# Altium PCB F407.PcbDoc (part 1 of 12)
Units mil, origin at the board's own origin, x right, y up, seen from the top; angles counter-clockwise.
Board outline 6062.25 x 4305.79 mil, 2 copper layers (Top Layer, Bottom Layer); 68 components, 138 nets, 423 pads, 108 vias.
Unrouted connection lines stored in the file: 2.
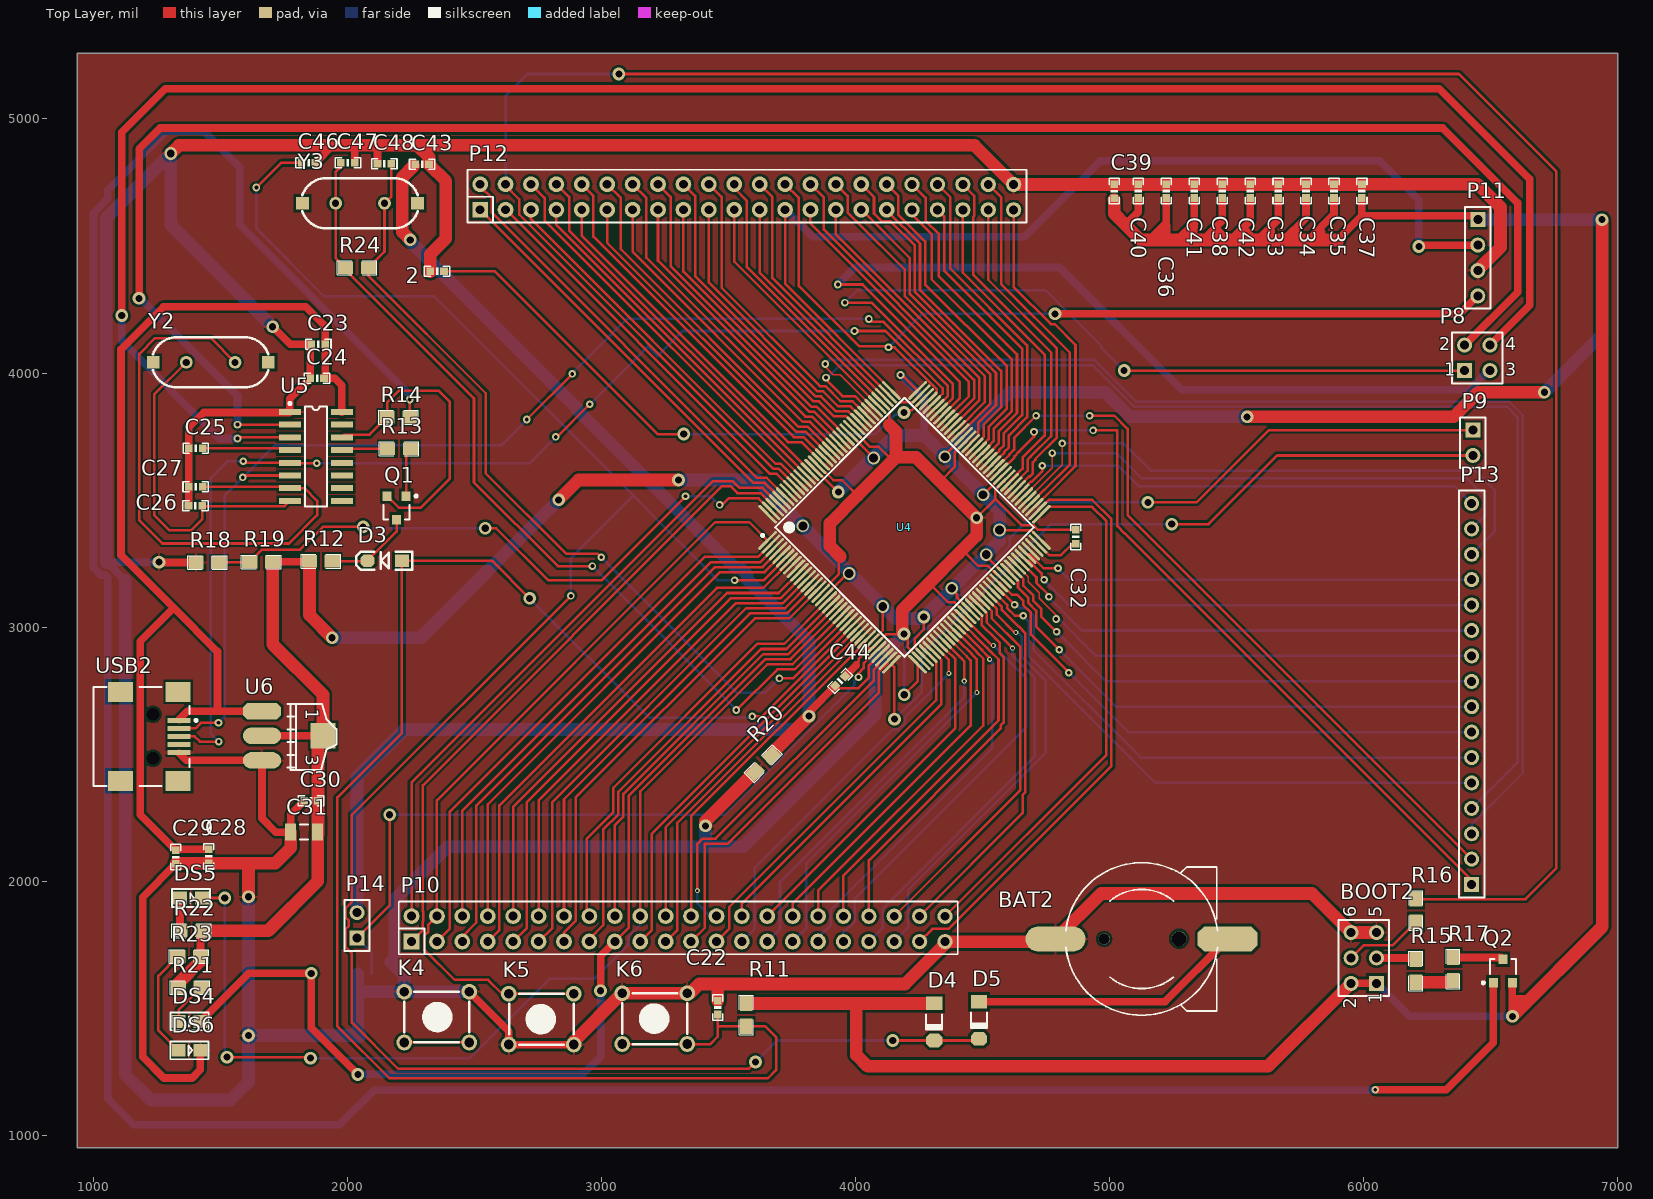
[diagram p0: Top Layer view]
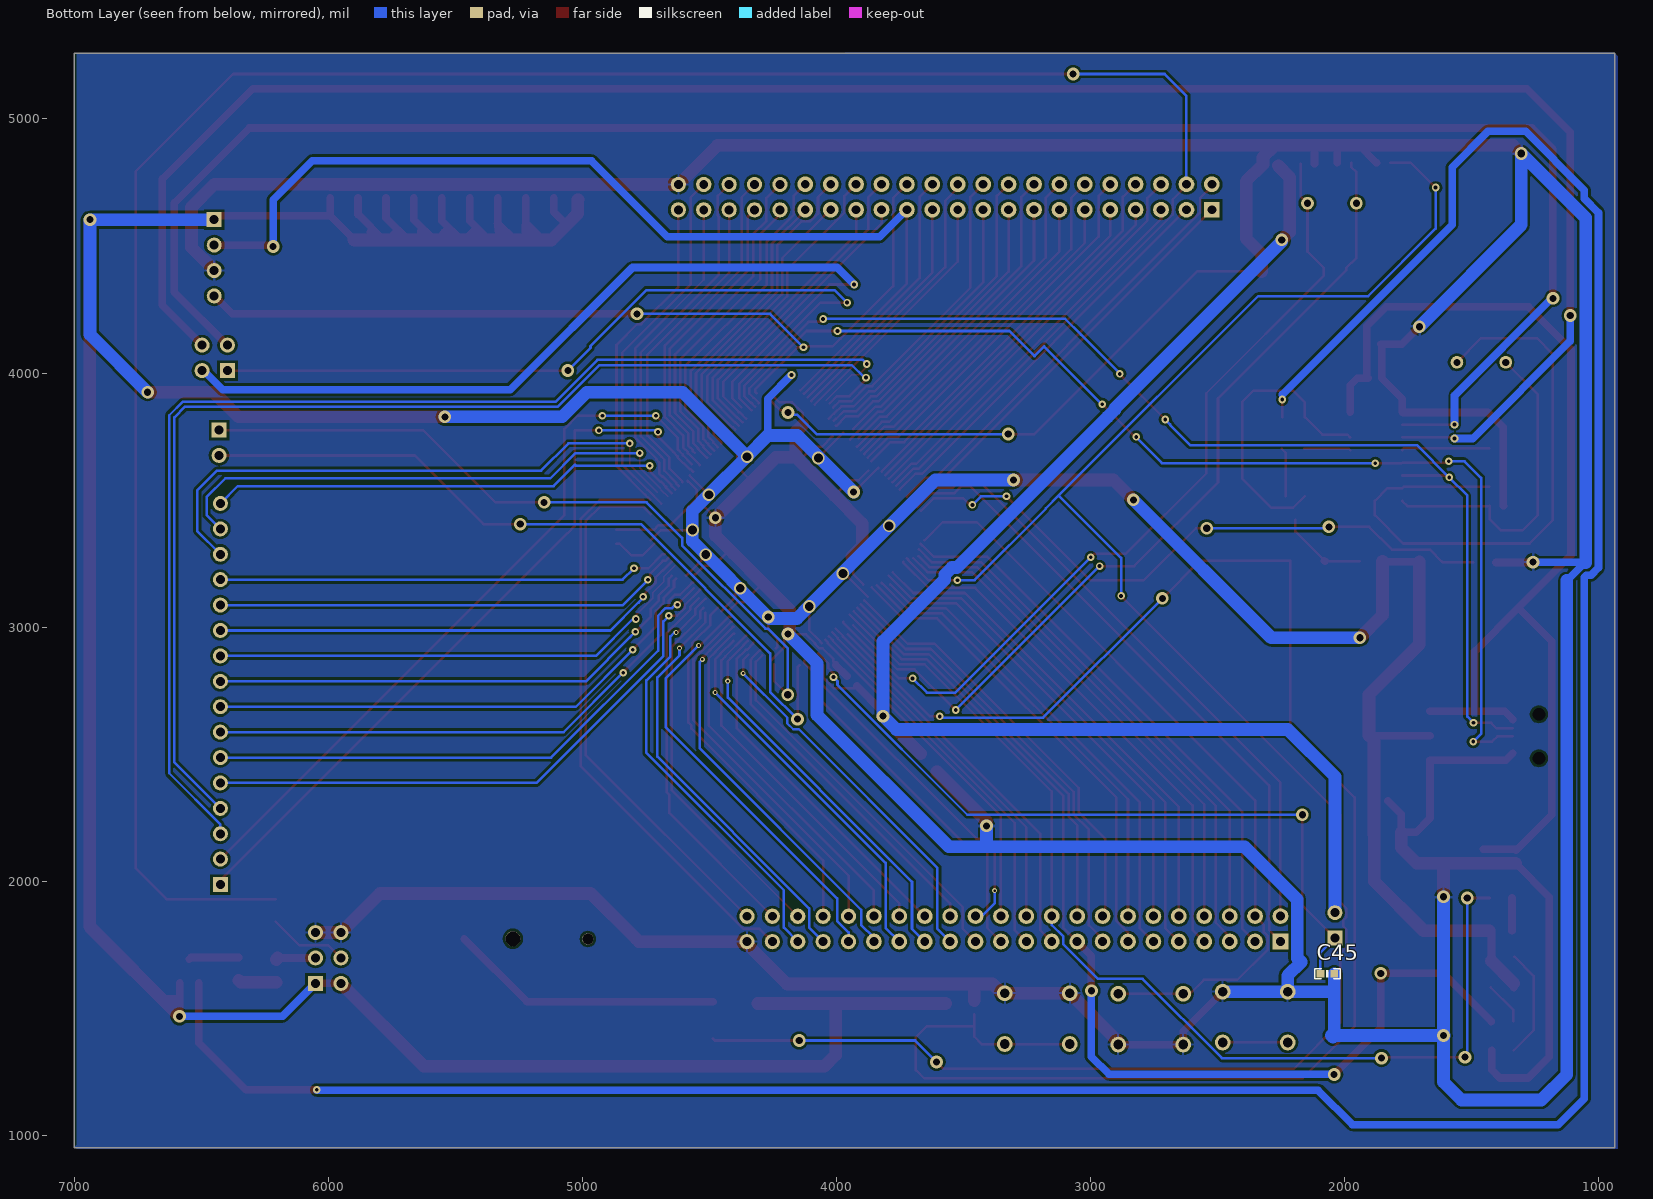
[diagram p1: Bottom Layer view, seen from below]

## Layer stack, top to bottom
Top Solder: solder mask 0.4, Solder Resist, Dk 3.5
Top Layer: signal copper 1.4
Dielectric 1: dielectric 12.6, FR-4, Dk 4.8
Bottom Layer: signal copper 1.4
Bottom Solder: solder mask 0.4, Solder Resist, Dk 3.5

## Board outline
937.75,952.41 937.75,5258.2 7000,5258.2 7000,952.41

## Design rules (kind name [scope] priority, off if disabled: settings)
Clearance U4 [InComponent('U4')] p1: gap=1 // UU
Clearance [All] p2: gap=10
PolygonConnect [All] p1: connectstyle=Relief reliefconductorwidth=10 reliefentries=4 polygonreliefangle="90 Angle" airgapwidth=10
RoutingVias [All] p1: holewidth=28 width=50 viastyle="Through Hole" minholewidth=28 minwidth=50 maxholewidth=28 maxwidth=50
SolderMaskExpansion [All] p1: expansion=4
Width VDD [InNet('VCC3.3')] p1: maxlimit=50 minlimit=10 preferedwidth=50
Width GND [InNet('GND')] p2: maxlimit=50 minlimit=10 preferedwidth=10
Width [All] p3: maxlimit=50 minlimit=5 preferedwidth=10
30 further rules are at their usual default settings.

## Components (designator, comment, footprint, x,y, rotation, side; value= is the part's Value field where it differs from the comment)
2 "225" 0603P 2353.72,4400.13 r180 top
BAT2 "BAT" BATM 5126.31,1772.91 r90 top
BOOT2 "Header 3X2" HDR2X3 6050.52,1598.29 r90 top
C22 "104" 0603P 3458.11,1503.44 r270 top
C23 "104" 0603P 1886.12,4113.86 r0 top
C24 "10uF" 0603P 1881.15,3979.42 r0 top
C25 "104" 0603P 1403.96,3703.78 r0 top
C26 "22" 0603P 1402.36,3478.35 r0 top
C27 "22" 0603P 1403.66,3552.69 r0 top
C28 "10uF" 0603P 1454.88,2098.42 r90 top
C29 "104" 0603P 1325.36,2095.4 r90 top
C30 "104" 0603P 1857.38,2317.12 r0 top
C31 "220uF" C1206 1830.49,2193.2 r180 top
C32 "C5" 0603P 4867.06,3355.37 r90 top
C33 "104" 0603P 5663.25,4716.58 r270 top
C34 "104" 0603P 5773.25,4716.58 r270 top
C35 "104" 0603P 5883.25,4716.58 r270 top
C36 "104" 0603P 5223.25,4716.58 r270 top
C37 "104" 0603P 5993.25,4716.58 r270 top
C38 "104" 0603P 5443.25,4716.58 r270 top
C39 "104" 0603P 5018.32,4716.08 r270 top
C40 "104" 0603P 5113.25,4716.58 r270 top
C41 "104" 0603P 5333.25,4716.58 r270 top
C42 "104" 0603P 5553.25,4716.58 r270 top
C43 "10uF" 0603P 2294.98,4821.34 r180 top
C44 "104" 0603P 3939.83,2788.33 r225 top
C45 "225" 0603P 2068.2,1636.12 r0 bottom
C46 "104" 0603P 1847.72,4827.95 r0 top
C47 "22" 0603P 2002.45,4828.32 r180 top
C48 "22" 0603P 2145.88,4824.29 r0 top
D3 "1N4148" SOD-123 2147.87,3261.73 r180 top
D4 "1N4148" "MINI_MELF (LL34)" 4309.74,1446.5 r270 top
D5 "1N4148" "MINI_MELF (LL34)" 4486.29,1452.92 r270 top
DS4 "LED0" SMDLED 1336.25,1448.57 r0 top
DS5 "LED1" SMDLED 1341.77,1934.4 r0 top
DS6 "LED3" SMDLED 1335.03,1335.03 r0 top
K4 "KEY_M" KEY_M 2224.66,1565.79 r0 top
K5 "KEY_M" KEY_M 2891.73,1357.47 r180 top
K6 "" KEY_M 3337.84,1359.63 r180 top
P8 "Header 2X2" HDR2X2 6396.88,4009.83 r0 top
P9 "Header 2" HDR1X2 6429.9,3775.74 r270 top
P10 "HEAD2*22" HEAD2*22 2252.61,1762.57 r0 top locked
P11 "Header 4" HDR1X4 6449.03,4603.71 r270 top
P12 "HEAD2*22" HEAD2*22 2522.61,4642.57 r0 top
P13 "Header 16" HDR1X16 6425.05,1987.04 r90 top
P14 "" HDR1X2 2038.59,1776.39 r90 top
Q1 "S8050" SOT-23R 2194.7,3474.96 r180 top
Q2 "S8550" SOT-23R 6547.45,1642.01 r0 top
R11 "10K" 0805 3570.07,1429.35 r90 top
R12 "10K" 0805 1941.15,3259.18 r180 top
R13 "1K" 0805 2248.64,3702.26 r180 top
R14 "1K" 0805 2246.85,3826.56 r180 top
R15 "10K" 0805 6204.59,1602.45 r90 top
R16 "10K" 0805 6206.14,1840.1 r90 top
R17 "1K" 0805 6351.99,1610.07 r90 top
R18 "0R" 0805 1494.6,3254.76 r180 top
R19 "0R" 0805 1616.82,3257.04 r0 top
R20 "10R" 0805 3668.77,2494.85 r225 top
R21 "510R" 0805 1425.52,1581.95 r180 top
R22 "510R" 0805 1341.64,1805.54 r0 top
R23 "510R" 0805 1332.69,1703.91 r0 top
R24 "R" 0805 1993.32,4414.79 r0 top
U4 "STM32F407ZET6" LQFP144 4193.03,3392.99 r45 top locked
U5 "CH340G" SOP16M 1876.7,3671.96 r270 top
U6 "AMS1117" AMS1117 1664.63,2672.66 r270 top
USB2 "USB5" USB/SM0.8-6H5 1029.22,2570.66 r180 top
Y2 "12MHz" XTAL_US 1366.52,4042.43 r0 top
Y3 "8MHz" XTAL_US 1954.45,4668.32 r0 top

## Footprints (in the part's own frame and the unit in brackets; to place one, negate y for a bottom-side part, rotate by r counter-clockwise, add the part's x,y. Pads: shape width x height; smd on the part's side, far side on the other; paste and mask are expansions set on the pad)
0603P [mil]
  rect 30x30 smd: 1(-27,0) 2(27.5,-0.06)
  silkscreen extent -50,-20 50,20
0805 [mil]
  rect 60x50 smd: 1(0,-0.06) 2(90,-0.06)
  silkscreen extent -33,-27 123,27
AMS1117 [mil]
  oct 65x150 smd: 1(3,0)
  oval 65x150 smd: 2(100.03,-0.06) 3(197,0)
  rect 100x100 smd: 4(100.03,239.94)
  silkscreen extent -26,100 234,293
BATM [mm]
  round 1.1 hole 1.1 unplated: 0(0,3.748)
  round 1.5 hole 1.5 unplated: 0(0.025,-3.752)
  oct 2.5x6 smd: 1(0,-8.602)
  oval 2.5x6 smd: 2(0,8.598)
  silkscreen extent -7.62,-7.58 7.62,7.57
C1206 [mm] "Chip Capacitor, Body 3.2x1.6mm, IPC High Density"
  rect 1.1x1.7 smd: 1(-1.35,0) 2(1.35,0)
  silkscreen extent -0.4,-0.75 0.4,0.75, body extent -1.7,-0.9 1.7,0.9, height 1.3
HDR1X2 [mm] "Connector; Header; 2 Position"
  rect 1.5x1.5 hole 0.9: 1(0,0)
  round 1.5 hole 0.9: 2(2.54,0)
  silkscreen extent -1.27,-1.27 3.81,1.27
HDR1X4 [mm] "Connector; Header; 4 Position"
  rect 1.5x1.5 hole 0.9: 1(0,0)
  round 1.5 hole 0.9: 2(2.54,0) 3(5.08,0) 4(7.62,0)
  silkscreen extent -1.27,-1.27 8.89,1.27
HDR1X16 [mm] "Connector; Header; 16 Position"
  rect 1.5x1.5 hole 0.9: 1(0,0)
  round 1.5 hole 0.9: 2(2.54,0) 3(5.08,0) 4(7.62,0) 5(10.16,0) 6(12.7,0) 7(15.24,0) 8(17.78,0) 9(20.32,0) 10(22.86,0) 11(25.4,0) 12(27.94,0) 13(30.48,0) 14(33.02,0) 15(35.56,0) 16(38.1,0)
  silkscreen extent -1.27,-1.27 39.37,1.27
HDR2X2 [mm] "Connector; Header; 2x2 Position"
  rect 1.5x1.5 hole 0.9: 1(0,0)
  round 1.5 hole 0.9: 2(0,2.54) 3(2.54,0) 4(2.54,2.54)
  silkscreen extent -1.27,-1.27 3.81,3.81
HDR2X3 [mm] "Connector; Header; 3x2 Position"
  rect 1.5x1.5 hole 0.9: 1(0,0)
  round 1.5 hole 0.9: 2(0,2.54) 3(2.54,0) 4(2.54,2.54) 5(5.08,0) 6(5.08,2.54)
  silkscreen extent -1.27,-1.27 6.35,3.81
HEAD2*22 [mil]
  rect 62x62 hole 35: 1(0.42,0.42)
  round 62 hole 35: 2(0.42,100.42) 3(100.42,0.42) 4(100.42,100.42) 5(200.42,0.42) 6(200.42,100.42) 7(300.42,0.42) 8(300.42,100.42) 9(400.42,0.42) 10(400.42,100.42) 11(500.42,0.42) 12(500.42,100.42) 13(600.42,0.42) 14(600.42,100.42) 15(700.42,0.42) 16(700.42,100.42) 17(800.42,0.42) 18(800.42,100.42) 19(900.42,0.42) 20(900.42,100.42) 21(1000.42,0.42) 22(1000.42,100.42) 23(1100.42,0.42) 24(1100.42,100.42) 25(1200.42,0.42) 26(1200.42,100.42) 27(1300.42,0.42) 28(1300.42,100.42) 29(1400.42,0.42) 30(1400.42,100.42) 31(1500.42,0.42) 32(1500.42,100.42) 33(1600.42,0.42) 34(1600.42,100.42)
  round 60 hole 35: 35(1700,0) 36(1700,100) 37(1800,0) 38(1800,100) 39(1900,0) 40(1900,100) 41(2000,0) 42(2000,100) 43(2100,0) 44(2100,100)
  silkscreen extent -50,-50 2150,157
KEY_M [mil]
  round 62 hole 38: 1(0,0) 1(255.91,0) 2(0,-200) 2(255.91,-200)
  silkscreen extent 0,-200 255,0
LQFP144 [mm]
  oval 2.54x0.3 smd: 1(-10.6,8.75) 2(-10.6,8.25) 3(-10.6,7.75) 4(-10.6,7.25) 5(-10.6,6.75) 6(-10.6,6.25) 7(-10.6,5.75) 8(-10.6,5.25) 9(-10.6,4.75) 10(-10.6,4.25) 11(-10.6,3.75) 12(-10.6,3.25) 13(-10.6,2.75) 14(-10.6,2.25) 15(-10.6,1.75) 16(-10.6,1.25) 17(-10.6,0.75) 18(-10.6,0.25) 19(-10.6,-0.25) 20(-10.6,-0.75) 21(-10.6,-1.25) 22(-10.6,-1.75) 23(-10.6,-2.25) 24(-10.6,-2.75) 25(-10.6,-3.25) 26(-10.6,-3.75) 27(-10.6,-4.25) 28(-10.6,-4.75) 29(-10.6,-5.25) 30(-10.6,-5.75) 31(-10.6,-6.25) 32(-10.6,-6.75) 33(-10.6,-7.25) 34(-10.6,-7.75) 35(-10.6,-8.25) 36(-10.6,-8.75) 73(10.6,-8.75) 74(10.6,-8.25) 75(10.6,-7.75) 76(10.6,-7.25) 77(10.6,-6.75) 78(10.6,-6.25) 79(10.6,-5.75) 80(10.6,-5.25) 81(10.6,-4.75) 82(10.6,-4.25) 83(10.6,-3.75) 84(10.6,-3.25) 85(10.6,-2.75) 86(10.6,-2.25) 87(10.6,-1.75) 88(10.6,-1.25) 89(10.6,-0.75) 90(10.6,-0.25) 91(10.6,0.25) 92(10.6,0.75) 93(10.6,1.25) 94(10.6,1.75) 95(10.6,2.25) 96(10.6,2.75) 97(10.6,3.25) 98(10.6,3.75) 99(10.6,4.25) 100(10.6,4.75) 101(10.6,5.25) 102(10.6,5.75) 103(10.6,6.25) 104(10.6,6.75) 105(10.6,7.25) 106(10.6,7.75) 107(10.6,8.25) 108(10.6,8.75)
  oval 0.3x2.54 smd: 37(-8.75,-10.6) 38(-8.25,-10.6) 39(-7.75,-10.6) 40(-7.25,-10.6) 41(-6.75,-10.6) 42(-6.25,-10.6) 43(-5.75,-10.6) 44(-5.25,-10.6) 45(-4.75,-10.6) 46(-4.25,-10.6) 47(-3.75,-10.6) 48(-3.25,-10.6) 49(-2.75,-10.6) 50(-2.25,-10.6) 51(-1.75,-10.6) 52(-1.25,-10.6) 53(-0.75,-10.6) 54(-0.25,-10.6) 55(0.25,-10.6) 56(0.75,-10.6) 57(1.25,-10.6) 58(1.75,-10.6) 59(2.25,-10.6) 60(2.75,-10.6) 61(3.25,-10.6) 62(3.75,-10.6) 63(4.25,-10.6) 64(4.75,-10.6) 65(5.25,-10.6) 66(5.75,-10.6) 67(6.25,-10.6) 68(6.75,-10.6) 69(7.25,-10.6) 70(7.75,-10.6) 71(8.25,-10.6) 72(8.75,-10.6) 109(8.75,10.6) 110(8.25,10.6) 111(7.75,10.6) 112(7.25,10.6) 113(6.75,10.6) 114(6.25,10.6) 115(5.75,10.6) 116(5.25,10.6) 117(4.75,10.6) 118(4.25,10.6) 119(3.75,10.6) 120(3.25,10.6) 121(2.75,10.6) 122(2.25,10.6) 123(1.75,10.6) 124(1.25,10.6) 125(0.75,10.6) 126(0.25,10.6) 127(-0.25,10.6) 128(-0.75,10.6) 129(-1.25,10.6) 130(-1.75,10.6) 131(-2.25,10.6) 132(-2.75,10.6) 133(-3.25,10.6) 134(-3.75,10.6) 135(-4.25,10.6) 136(-4.75,10.6) 137(-5.25,10.6) 138(-5.75,10.6) 139(-6.25,10.6) 140(-6.75,10.6) 141(-7.25,10.6) 142(-7.75,10.6) 143(-8.25,10.6) 144(-8.75,10.6)
  silkscreen extent -10.72,-9.15 9.15,9.57, body extent -11,-11 11,11, height 1.6
"MINI_MELF (LL34)" [mm] "1.5*3.4mm(直径，脚距）"
  rect 1.37x1.62 smd: 1(-1.855,0)
  oct 1.37x1.62 smd: 2(1.855,0)
  silkscreen extent -0.76,-0.8 0.78,0.8, body extent -1.7,-0.75 1.7,0.75, height 1.5
SMDLED [mm]
  rect 1.4x1.27 smd: 1(0.001,-0.002) 2(2.211,-0.002)
  silkscreen extent -0.8,-0.89 3.01,0.89
SOD-123 [mil] "2.7x1.6X1.1mm（长宽高，不包括引脚）"
  rect 55x50 smd: 1(-67.5,0)
  oct 55x50 smd: 2(67.5,0)
  silkscreen extent -108,-35 112,35, body extent -73,-31 73,31, height 48
SOP16M [mm]
  rect 0.6x2.2 smd: 1(-4.445,-2.6) 2(-3.175,-2.6) 3(-1.905,-2.6) 4(-0.635,-2.6) 5(0.635,-2.6) 6(1.905,-2.6) 7(3.175,-2.6) 8(4.445,-2.6) 9(4.445,2.6) 10(3.175,2.6) 11(1.905,2.6) 12(0.635,2.6) 13(-0.635,2.6) 14(-1.905,2.6) 15(-3.175,2.6) 16(-4.445,2.6)
  silkscreen extent -5.42,-2.72 5,1.1
SOT-23R [mm]
  rect 0.9x0.95 smd: 1(0.95,-1.048) 2(-0.95,-1.048) 3(0,1.302)
  silkscreen extent -2.07,-1.17 1.3,1.3
USB/SM0.8-6H5 [mm]
  rect 2.3x0.5 smd: 1(-7.85,-1.6) 2(-7.85,-0.8) 3(-7.85,0) 4(-7.85,0.8) 5(-7.85,1.6)
  rect 2.5x2 smd: 6(-7.75,4.45) 7(-1.996,4.45) 8(-7.75,-4.45) 9(-1.996,-4.45)
  round 0.6 hole 1.27 unplated: MH1(-5.25,2.2) MH2(-5.25,-2.2)
  silkscreen extent -9.68,-4.95 0.7,4.95
XTAL_US [mil]
  round 50 hole 28: 1(0,0) 2(192.13,0)
  rect 50x50 smd: ""(-130.32,0) ""(322.44,0)
  silkscreen extent -131,-98 323,98

## Part data
2 C22 C23 C24 C25 C26 C27 C28 C29 C30 C32 C33 C34 C35 C36 C37 C38 C39 C40 C41 C42 C43 C44 C45 C46 C47 C48: library part C
BOOT2: "Header, 3-Pin, Dual row"
C31: library part CAP
D3: library part D
D4 D5: "高速开关二极管"
DS4 DS5 DS6: library part LED2, "Typical RED, GREEN, YELLOW, AMBER GaAs LED"
K6: library part KEY_M
P8: "Header, 2-Pin, Dual row"
P9: "Header, 2-Pin"
P11: "Header, 4-Pin"
P13: "Header, 16-Pin"
P14: library part "Header 2", "Header, 2-Pin"
Q1: library part NPN, "8050/BCW846/BCW847"
Q2: library part PNP, "8550/BCW68"
R11 R12 R13 R14 R15 R16 R17 R18 R19 R20 R21 R22 R23: library part R
U5: "USB2UART"
Y2 Y3: library part XTAL, "Crystal Oscillator"

## Via types
v1: diameter 30, hole 15, Top Layer to Bottom Layer, 48 vias
v2: diameter 50, hole 28, Top Layer to Bottom Layer, 42 vias
v3: diameter 50, hole 35, Top Layer to Bottom Layer, 9 vias
v4: diameter 20, hole 10, Top Layer to Bottom Layer, 8 vias
v5: diameter 50, hole 30, Top Layer to Bottom Layer, 1 vias

## Nets (pads, with @x,y where several pads share a name; then routed paths per layer and width w, separated by ;. In a path a pad name is that pad's centre, name@x,y a point inside that pad or via, vN(x,y) a via of type N, cw(c..) or ccw(c..) an arc to the next point about the centre after c; other vN are vias at no path point)
BOOT0: R15.1 R17.1 | length 150.6
  Top Layer w50: R15.1@6204.65,1602.45 6344.43,1602.45 R17.1@6352.05,1610.07
BOOT1: P12.4 R16.2 U4.136 | length 9694.9
  Top Layer w10: P12.4@2623.03,4742.99 2623.03,4737.99 2677.03,4683.99 2677.03,4623.94 3677.98,3622.99 3698.56,3622.99 U4.136@3765.7,3555.85 ; v2(3068.86,5177.04) 6374.42,5177.04 6758.69,4792.77 6758.69,2051.54 6637.25,1930.1 R16.2@6206.2,1930.1
  Bottom Layer w10: P12.4@2623.03,4742.99 2623.03,5090.86 2709.21,5177.04 v2(3068.86,5177.04)
GND: 2.2 BAT2.2 BOOT2.5 BOOT2.6 C22.1 C23.1 C24.1 C25.1 C26.1 C27.1 C28.1 C29.1 C30.1 C31.2 C32.2 C33.1 C34.1 C35.1 C36.1 C37.1 C38.1 C39.1 C40.1 C41.1 C42.1 C43.1 C44.1 C45.1 C46.2 C47.1 C48.1 DS6.2 K4.1 K5.1 K6.2 P10.43 P11.3 P12.44 R18.2 R20.2 U4.16 U4.31 U4.38 U4.51 U4.61 U4.83 U4.94 U4.107 U4.120 U4.130 U5.1 U6.3 USB2.5 | length 29026.3
  Top Layer w10: v2(3410,2218.27) v2@3410,2236.17 ; U4.130@3875.63,3615.63 3913.04,3578.22 3948.13,3578.22 4008.69,3517.67 ; U4.16@3895.29,3166.18 3895.29,3169.68 3935.12,3209.51 3935.12,3272.91 3940.42,3278.2 ; 4002.52,2851.01 4006.57,2851.01 4006.57,2859.57 4012.52,2865.52 4012.52,2866.27 4012.85,2866.61 4012.85,2875.53 4054.25,2916.94 4067.19,2916.94 4084.76,2934.51 4084.76,2936.74 4119.62,2971.59 v2@4167.7,2971.59 ; U4.120@4015.72,3751.7 4057.43,3710 4091.65,3710 4132.69,3668.96 4159.98,3668.96 ; 4132.63,3796.64 4132.63,3843.06 4174.43,3884.86 4225.11,3884.86 4229.96,3889.7 U4.107@4258.23,3917.98 ; v2(4190.67,2973.24) 4205.12,2958.79 4205.12,2921.57 U4.38@4258.45,2868.23 ; 4289.35,3173.2 4365.25,3097.3 4390.85,3097.3 4426.8,3061.34 U4.51@4423.86,3061.34 ; 4333.79,3574.01 4391.68,3631.9 4391.68,3688.64 4433.32,3730.28 U4.94@4433.32,3726.45 ; 4406.02,3289.87 4434.89,3289.87 4483.31,3241.44 4521.24,3241.44 4553.42,3209.27 U4.61@4557.05,3209.27 ; v2(4477.05,3430.75) 4551.01,3504.71 ; U4.83@4586.44,3572.67 4586.44,3576.78 4551.01,3541.35 4551.01,3504.71 ; C32.2@4867.13,3382.87 4719.07,3382.87 4700.52,3401.41 4654.31,3401.41 4551.01,3504.71
  Top Layer w30: v2(1259.41,3256.18) 1260.76,3254.83 R18.2@1404.6,3254.83 ; C29.1@1328.37,2071.42 C29.1@1325.36,2068.4 1194.64,1937.69 1194.64,1310.03 1278.66,1226 1389.17,1226 1422.07,1258.9 DS6.2@1422.07,1334.97 ; USB2.5@1338.27,2504.33 1366.93,2475.66 U6.3@1664.63,2475.66 1664.63,2248.03 1719.46,2193.2 C31.2@1777.34,2193.2 1777.34,2264.08 C30.1@1830.38,2317.12 ; C26.1@1375.36,3478.35 1376.96,3479.96 C25.1@1376.96,3703.78 1376.96,3786.52 1435.28,3844.85 1772.22,3844.85 U5.1@1774.33,3846.96 1774.33,3899.6 C24.1@1854.15,3979.42 1854.15,4108.9 C23.1@1859.12,4113.86 1775.03,4113.86 v2(1706.41,4182.48) ; C46.2@1875.22,4827.89 1943.61,4896.28 ; 2028.39,4896.28 2029.45,4895.22 C47.1@2029.45,4828.32 ; 2118.52,4896.28 2118.88,4895.93 C48.1@2118.88,4824.29 ; K4.1@2480.57,1565.79 2635.82,1410.54 K5.1@2635.82,1357.47 K5.1@2891.73,1357.47 ; K6.2@3337.84,1559.63 K6.2@3349.6,1559.63 ; 3455.66,1595.5 3458.11,1593.05 ; C44.1@3958.92,2807.42 4002.52,2851.01 ; C39.1@5017.42,4742.19 5017.81,4742.57 C39.1@5018.32,4743.08
  Top Layer w50: v5(1305.3,4864.24) 1337.34,4896.28 1943.61,4896.28 2028.39,4896.28 2118.52,4896.28 2275.6,4896.28 ; C29.1@1328.37,2071.42 C28.1@1454.88,2071.42 1611.23,2071.42 ; v2(1611.23,1939.03) 1611.23,2071.42 ; C31.2@1777.34,2193.2 1777.34,2131.71 1717.05,2071.42 1611.23,2071.42 ; 2.2@2326.22,4400.19 2326.22,4467.26 2387.96,4529 2387.96,4755.37 C43.1@2321.98,4821.34 2321.98,4849.9 2275.6,4896.28 ; K5.1@2891.73,1357.47 2891.73,1369.42 K6.2@3081.93,1559.63 K6.2@3337.84,1559.63 ; K6.2@3349.6,1559.63 3385.47,1595.5 3455.66,1595.5 4195.02,1595.5 4352.61,1753.09 P10.43@4352.61,1762.57 4777.45,1762.57 BAT2.2@4787.79,1772.91 4967.19,1952.31 5796.5,1952.31 BOOT2.6@5950.52,1798.29 BOOT2.5@6050.52,1798.29 ; v2@3410,2236.17 R20.2@3605.09,2431.26 ; C22.1@3458.11,1530.44 3458.11,1593.05 ; 3940.42,3278.2 3899.35,3319.27 3899.35,3408.33 4008.69,3517.67 4159.98,3668.96 ; 4132.63,3796.64 4159.98,3769.29 4159.98,3668.96 ; v2(4190.67,2973.24) 4184.08,2979.83 4184.08,3067.93 4289.35,3173.2 4406.02,3289.87 4477.05,3360.9 v2(4477.05,3430.75) 4333.79,3574.01 4238.84,3668.96 4159.98,3668.96 ; P11.3@6448.19,4404.55 6538.48,4494.85 6538.48,4652.86 6447.77,4743.58 C37.1@5993.25,4743.58 5992.24,4742.57 5773.25,4742.57 5443.25,4742.57 5223.25,4742.57 5017.81,4742.57 P12.44@4622.61,4742.57 4468.89,4896.28 2275.6,4896.28
  Bottom Layer w10: 2041.2,1569.48 2044.89,1565.79 ; 3402.03,2135.81 3410,2143.78
  Bottom Layer w30: 1126.1,3183.65 1053.57,3256.18 v2(1259.41,3256.18)
  Bottom Layer w50: 1051.61,3254.21 1051.61,4610.55 v5(1305.3,4864.24) 1305.3,4583.6 v2(1706.41,4182.48) ; 1126.1,3183.65 1126.1,1239.94 1226.53,1139.5 1540.35,1139.5 1611.23,1210.38 v2(1611.23,1393.15) ; v2@1608.67,1393.15 v2(1611.23,1393.15) ; v2(1611.23,1939.03) v2(1611.23,1393.15) ; C45.1@2041.2,1636.12 2041.2,1569.48 2041.2,1393.15 ; 2044.89,1565.79 K4.1@2224.66,1565.79 ; K4.1@2480.57,1565.79 K4.1@2224.66,1565.79 ; 3410,2143.78 v2(3410,2218.27) ; v2@4191.25,2973.24 4076.56,2858.55 4076.56,2654.32 3558.06,2135.81 3402.03,2135.81 2393.85,2135.81 2187.03,1928.99 2187.03,1698.47 2170.95,1682.39 2224.66,1628.67 K4.1@2224.66,1565.79 ; v2(1611.23,1393.15) 2041.2,1393.15 ; 2041.2,1393.15 2041.2,1392.24 2046.16,1387.29 2052.02,1393.15 2041.2,1393.15
KEY0: K4.2 P10.1 U4.142 | length 2796.2
  Top Layer w10: K4.2@2224.66,1365.79 K4.2@2480.57,1365.79 ; P10.1@2253.03,1762.99 2298.03,1807.99 2298.03,1842.94 2299.03,1843.94 2299.03,1882.05 2298.03,1883.05 2298.03,2377.7 3475.54,3555.21 3508.68,3555.21 3535.9,3527.99 3626.08,3527.99 U4.142@3681.97,3472.11
KEY1: K5.2 P10.4 U4.1 | length 3052.7
  Top Layer w10: K5.2@2891.73,1557.47 K5.2@2635.82,1557.47 2608.86,1557.47 2554.54,1611.79 2422.99,1611.79 2302.59,1732.2 2302.59,1784.26 2318.32,1800 2318.32,1828.28 P10.4@2353.03,1862.99 2353.03,2317.99 3448.03,3412.99 3582.85,3412.99 U4.1@3654.35,3341.49
LED0: DS4.2 P10.17 U4.21 | length 4170.3
  Top Layer w10: P10.17@3053.03,1762.99 3107.03,1816.99 3107.03,2335.77 3645.41,2874.14 3744.67,2874.14 U4.21@3933.18,3062.66
  Top Layer w30: DS4.2@1423.29,1448.51 1612.58,1637.8 v2(1858.27,1637.8) 1858.27,1423.47 v2(2041.7,1240.05) ; v2(2997.07,1569.13) 2997.07,1707.03 P10.17@3053.03,1762.99
  Bottom Layer w30: v2(2041.7,1240.05) 2927.61,1240.05 2997.07,1309.51 v2(2997.07,1569.13)
LED1: DS5.2 P10.20 U4.22 | length 4189.3
  Top Layer w10: DS5.2@1428.81,1934.34 v2(1518,1934.34) ; v2(1526.96,1307.93) 1851.5,1307.93 v2(1855.36,1304.06) ; P10.20@3153.03,1862.99 3153.03,2353.48 3653.69,2854.14 3752.96,2854.14 U4.22@3947.33,3048.51
  Bottom Layer w10: v2(1518,1934.34) 1518,1316.88 v2(1526.96,1307.93) ; v2(1855.36,1304.06) 2483.89,1304.06 2795.57,1615.74 2970.83,1615.74 3107.03,1751.94 3107.03,1782.05 3153.03,1828.05 P10.20@3153.03,1862.99
Net2_1: 2.1 U4.106 | length 2216.4
  Top Layer w10: 2.1@2380.72,4400.13 2581.06,4400.13 3221.24,3759.94 v2(3324.42,3759.94) ; v2(4191,3844.86) 4199.86,3853.72 4222.25,3853.72 4238.24,3869.7 U4.106@4272.37,3903.84
  Bottom Layer w10: v2(3324.42,3759.94) 4078.69,3759.94 4154.46,3835.71 4181.86,3835.71 v2(4191,3844.86)
NetBAT2_1: BAT2.1 D5.1 | length 1081
  Top Layer w30: D5.1@4486.29,1525.95 5218,1525.95 BAT2.1@5464.95,1772.91
NetBOOT2_3: BOOT2.3 R15.2 | length 156.6
  Top Layer w30: BOOT2.3@6050.52,1698.29 R15.2@6198.8,1698.29
  Top Layer w50: R15.2@6198.8,1698.29 R15.2@6204.65,1692.45
NetBOOT2_4: BOOT2.4 R16.1 | length 314.4
  Top Layer w10: BOOT2.4@5950.52,1698.29 6000.95,1748.73 6114.83,1748.73 R16.1@6206.2,1840.1
NetC25_2: C25.2 U5.4 | length 345.7
  Top Layer w10: C25.2@1431.46,3703.71 1767.58,3703.71 U5.4@1774.33,3696.96
NetC26_2: C26.2 U5.8 Y2.1 | length 1292.5
  Top Layer w10: Y2.1@1366.52,4042.43 1241.38,3917.29 1241.38,3439.87 1300.4,3380.85 1385,3380.85 1429.86,3425.71 C26.2@1429.86,3478.29 1432,3476.15 1753.53,3476.15 U5.8@1774.33,3496.96
NetC27_2: C27.2 U5.7 Y2.2 | length 2410.4
  Top Layer w10: C27.2@1431.16,3552.63 1768.66,3552.63 U5.7@1774.33,3546.96 1831.81,3546.96 1881.65,3497.12 1881.65,3440.85 1770.2,3329.4 1272.69,3329.4 1181.81,3420.28 1181.81,4075.16 1244.33,4137.68 1463.39,4137.68 Y2.2@1558.64,4042.43
NetC32_1: C32.1 U4.71 | length 186.3
  Top Layer w10: U4.71@4717.79,3327.57 4762.06,3283.3 4808.65,3283.3 4853.72,3328.37 C32.1@4867.06,3328.37
NetD3_2: D3.2 Q1.3 R12.1 | length 349.6
  Top Layer w10: R12.1@1941.15,3259.25 D3.2@2077.89,3259.25 ; D3.2@2080.37,3261.73 2194.7,3376.06 Q1.3@2194.7,3423.7
  Top Layer w30: D3.2@2077.89,3259.25 D3.2@2080.37,3261.73
NetDS4_1: DS4.1 R21.1 | length 170.5
  Top Layer w10: DS4.1@1336.28,1448.51 1336.28,1492.78 R21.1@1425.52,1582.01
NetDS5_1: DS5.1 R22.1 | length 128.9
  Top Layer w30: R22.1@1341.64,1805.48 1341.64,1934.18 DS5.1@1341.8,1934.34
NetDS6_1: DS6.1 R23.1 | length 433.1
  Top Layer w10: R23.1@1332.69,1703.85 1256.41,1627.58 1256.41,1413.62 DS6.1@1335.06,1334.97
NetQ1_1: Q1.1 R14.2 U5.14 | length 1168.1
  Top Layer w10: U5.14@1979.06,3746.96 1989.66,3757.55 2087.79,3757.55 R14.2@2156.85,3826.62 2156.85,3883.88 2204.3,3931.33 2359.03,3931.33 2404.26,3886.1 2404.26,3584.97 2290,3470.71 2202.82,3470.71 Q1.1@2157.3,3516.22
NetQ1_2: Q1.2 R13.1 | length 192.9
  Top Layer w10: Q1.2@2232.11,3516.22 2232.11,3685.79 R13.1@2248.64,3702.32
NetQ2_2: Q2.2 R14.1 | length 11431.5
  Top Layer w10: v1(2246.37,3895.88) 2246.85,3895.4 R14.1@2246.85,3826.62
  Top Layer w30: v1(6045.85,1179.34) 6324.93,1179.34 6510.05,1364.46 Q2.2@6510.05,1600.75
  Bottom Layer w10: v1(2246.37,3895.88) 2246.37,3915.68
  Bottom Layer w30: 2246.37,3915.68 1577.48,4584.57 1577.48,4810.17 1436.38,4951.27 1288.51,4951.27 1057.39,4720.15 1057.39,4687.04 1001.61,4631.26 1001.61,3233.5 1030.9,3204.21 1048.97,3204.21 1057.39,3195.79 1057.39,1145.09 1160.17,1042.31 1969.32,1042.31 2105.45,1178.43 v1@6045.85,1178.43
NetQ2_3: Q2.3 R17.2 | length 198.2
  Top Layer w30: R17.2@6352.05,1700.07 6540.65,1700.07 Q2.3@6547.45,1693.27
NetR13_2: R13.2 U5.13 | length 181.8
  Top Layer w10: U5.13@1979.06,3696.96 1984.42,3702.32 R13.2@2158.64,3702.32
NetR18_1: R18.1 R19.1 U4.143 | length 2500.4
  Top Layer w10: R18.1@1494.6,3254.83 1614.68,3254.83 R19.1@1616.82,3256.97 1665.38,3305.53 1814.57,3305.53 1903.81,3394.77 v2(2062.46,3394.77) ; v2(2543.09,3389.36) 2586.12,3389.36 2791.38,3184.1 3000.06,3184.1 v1(3331.17,3515.21) ; v1(3465.5,3481.3) 3475.14,3481.3 3500.58,3506.74 3619.05,3506.74 U4.143@3667.82,3457.97
  Bottom Layer w10: v2(2062.46,3394.77) 2067.87,3389.36 v2(2543.09,3389.36) ; v1(3331.17,3515.21) 3431.59,3515.21 v1(3465.5,3481.3)
PA0: P10.26 U4.34 | length 1399.4
  Top Layer w10: v4(3378.03,1962.99) 3378.03,2147.28 3398.75,2167.99 3449.48,2167.99 4072.52,2791.02 4072.52,2833.14 4090.02,2850.64 4090.02,2858.92 U4.34@4113.47,2882.37
  Bottom Layer w10: v4(3378.03,1962.99) 3378.03,1912.99 3428.03,1862.99 P10.26@3453.03,1862.99
PA1: P10.23 U4.35 | length 1479.5
  Top Layer w10: P10.23@3353.03,1762.99 3407.03,1816.99 3407.03,2147.99 3498.21,2147.99 4092.52,2742.3 4092.52,2824.85 4127.61,2859.95 U4.35@4127.61,2868.23
PA2: P9.2 U4.36 | length 3009.2
  Top Layer w10: 4145.89,2849.95 4152.06,2843.78 4152.06,2640.19 v2(4153.93,2638.32) ; v2(5244.85,3405.72) 5389.46,3405.72 5659.47,3675.74 P9.2@6429.9,3675.74
  Bottom Layer w10: v2(4153.93,2638.32) 4261.37,2745.76 4261.37,2896.86 4770.23,3405.72 v2(5244.85,3405.72)
PA3: P9.1 U4.37 | length 2936.1
  Top Layer w10: v2(4192.06,2734.27) 4244.53,2786.75 4244.53,2853.87 U4.37@4244.31,2854.09 ; v2(5150.81,3491.17) 5343.03,3491.17 5627.59,3775.74 P9.1@6429.9,3775.74
  Bottom Layer w10: v2(4192.06,2734.27) 4191.49,2734.84 4191.49,2916.91 4269.2,2994.62 4280.33,2994.62 4607.48,3321.77 4607.48,3351.51 4747.14,3491.17 v2(5150.81,3491.17)
PA4: P10.25 U4.40 | length 1495.9
  Top Layer w10: P10.25@3453.03,1762.99 3503.03,1812.99 3503.03,1897.99 4318.03,2712.99 4318.03,2863.49 4292.37,2889.15 U4.40@4292.37,2889.99
PA5: P10.28 U4.41 | length 1388.1
  Top Layer w10: P10.28@3553.03,1862.99 3553.03,1912.99 4338.03,2697.99 4338.03,2871.78 4334.07,2875.74 4334.07,2876.58 4300.66,2909.99 U4.41@4300.21,2909.99
PA6: P10.27 U4.42 | length 1486.5
  Top Layer w10: U4.42@4348.21,2890.72 4368.03,2870.9 v4(4368.03,2817.99)
  Bottom Layer w10: P10.27@3553.03,1762.99 3603.03,1812.99 3603.03,2052.99 4148.36,2598.32 4170.5,2598.32 4193.93,2621.75 4193.93,2643.89 v4(4368.03,2817.99)
PA7: P10.30 U4.43 | length 1410.6
  Top Layer w10: P10.30@3653.03,1862.99 4393.03,2602.99 4393.03,2874.18 4356.49,2910.72 4352.48,2910.72 4328.05,2935.15 U4.43@4328.05,2937.83
PA8: P12.27 U4.100 | length 1120
  Top Layer w10: P12.27@3823.03,4642.99 3823.03,4589.01 4446.77,3965.28 4446.77,3908.97 4383.9,3846.11 4381.68,3846.11 U4.100@4355.89,3820.32
PA9: P8.3 U4.101 | length 3575.3
  Top Layer w10: v1(3931.09,4348.67) 4027.84,4348.67 4410.69,3965.82 4410.69,3901.18 U4.101@4375.62,3866.11
  Bottom Layer w30: v1(3931.09,4348.67) 3931.23,4348.67 3998.13,4415.57 4803.05,4415.57 5284.79,3933.83 6415.29,3933.83 P8.3@6494.09,4012.62
PA10: P8.1 U4.102 | length 3276.4
  Top Layer w10: v1(3958.29,4277.45) 4062.8,4277.45 4383.54,3956.71 4383.54,3902.31 U4.102@4334.58,3853.35 ; v2(5057.61,4009.83) P8.1@6396.88,4009.83
  Bottom Layer w10: v1(3958.29,4277.45) 4007.55,4326.71 4748.25,4326.71 4968.27,4106.7 4968.27,4099.17 v2(5057.61,4009.83)
PA11: U4.103 U5.6 USB2.2 | length 4602.1
  Top Layer w10: USB2.2@1338.27,2602.16 1402.53,2602.16 1424.08,2623.72 v1(1493.48,2623.72) ; v1(1588.92,3589.68) 1596.2,3596.96 U5.6@1774.33,3596.96 ; v1(2706.36,3817.45) v1(2885.7,3996.79) ; v1(4053.08,4213.04) 4064.63,4201.49 4110.49,4201.49 4363.54,3948.43 4363.54,3910.6 4336,3883.05 4334.51,3883.05 4334.51,3881.56 U4.103@4320.43,3867.49
  Bottom Layer w10: v1(1493.48,2623.72) 1517.55,2647.79 1517.55,3518.31 v1(1588.92,3589.68) 1716.1,3716.85 2608.21,3716.85 2687.4,3796.04 2687.4,3798.49 v1(2706.36,3817.45) ; v1@2884.77,3997.73 3038.72,4151.68 3100.09,4213.04 v1(4053.08,4213.04)
PA12: U4.104 U5.5 USB2.3 | length 4541.1
  Top Layer w10: USB2.3@1338.27,2570.66 1398.97,2570.66 1419.77,2549.86 v1(1494.1,2549.86) ; v1(1590.75,3652.94) 1596.73,3646.96 U5.5@1774.33,3646.96 1775.81,3645.48 v1(1879.84,3645.48) ; v1(2820.41,3748.98) 2825.9,3748.98 v1(2954.46,3877.54) ; v1(3996.1,4165.71) 4117.98,4165.71 4343.54,3940.15 4343.54,3918.88 4327.71,3903.05 4325.48,3903.05 4306.29,3883.86 U4.104@4306.29,3881.63
  Bottom Layer w10: v1(1494.1,2549.86) 1463.48,2580.47 1463.48,3587.57 1528.85,3652.94 v1(1590.75,3652.94) ; v1(1879.84,3645.48) 2719.37,3645.48 v1@2821.64,3747.75 ; v1@2955.15,3876.84 3183.03,4104.72 3221.08,4066.66 3320.13,4165.71 v1(3996.1,4165.71)
PA13: P11.4 P12.26 U4.105 | length 3561
  Top Layer w10: P12.26@3723.03,4742.99 3777.03,4688.99 3777.03,4342.35 3983.67,4135.71 3984.58,4135.71 4014.11,4106.18 4125.58,4106.18 v1(4130.23,4101.53) 4153.87,4101.53 4320.39,3935.01 4320.39,3926.24 U4.105@4314.24,3920.09
  Top Layer w30: v2(4785.29,4233.11) 6378.43,4233.11 P11.4@6449.03,4303.71
  Bottom Layer w10: v1@4130.23,4095.68 v1(4130.23,4101.53) 4261.81,4233.11 v2(4785.29,4233.11)
PA14: P11.2 P12.25 U4.109 | length 4027.9
  Top Layer w10: P12.25@3723.03,4642.99 3723.03,4351.95 U4.109@4142.42,3932.56
  Top Layer w30: v2(6217.19,4497.84) 6223.05,4503.71 P11.2@6449.03,4503.71
  Bottom Layer w30: P12.25@3723.03,4642.99 3830.02,4536.01 4665.53,4536.01 4964.55,4835.02 6063.56,4835.02 6217.19,4681.39 v2(6217.19,4497.84)
PA15: P12.24 U4.110 | length 1033.8
  Top Layer w10: P12.24@3623.03,4742.99 3673.03,4692.99 3673.03,4373.67 U4.110@4128.28,3918.42
PB0: P10.31 U4.46 | length 1513.1
  Top Layer w10: U4.46@4406.05,2946.01 4458.03,2894.03 4458.03,2892.78 4478.03,2872.78 v4(4478.03,2742.99)
  Bottom Layer w10: P10.31@3753.03,1762.99 3807.03,1816.99 3807.03,2071.99 v4(4478.03,2742.99)
PB1: P10.34 U4.47 | length 1423.6
  Top Layer w10: P10.34@3853.03,1862.99 3853.03,1962.99 4503.03,2612.99 4503.03,2876.07 4478.03,2901.07 4478.03,2902.32 4406.84,2973.5 U4.47@4402.84,2973.5
PB2: P10.33 U4.48 | length 1580.4
  Top Layer w10: U4.48@4403.73,3000.9 4407.74,3000.9 4498.03,2910.6 4498.03,2909.35 4524.39,2882.99 4525.64,2882.99 4528.03,2880.6 v4(4528.03,2872.99)
  Bottom Layer w10: P10.33@3853.03,1762.99 3853.03,1777.99 3903.03,1827.99 3903.03,1887.99 4538.03,2522.99 4538.03,2862.99 v4(4528.03,2872.99)
PB3: P12.7 U4.133 | length 1452.8
  Top Layer w10: P12.7@2823.03,4642.99 2823.03,4583.38 U4.133@3808.13,3598.28
PB4: P12.6 U4.134 | length 1602.5
  Top Layer w10: P12.6@2723.03,4742.99 2777.03,4688.99 2777.03,4601.09 U4.134@3793.99,3584.13
PB5: P12.5 U4.135 | length 1522.8
  Top Layer w10: P12.5@2723.03,4642.99 2723.03,4606.22 3686.26,3642.99 3706.85,3642.99 U4.135@3779.85,3569.99
PB7: P12.3 U4.137 | length 1584.7
  Top Layer w10: P12.3@2623.03,4642.99 2624.22,4642.99 3664.22,3602.99 3690.28,3602.99 U4.137@3751.56,3541.71
PB8: P12.2 U4.139 | length 1748.6
  Top Layer w10: P12.2@2523.03,4742.99 2523.03,4734.99 2569.03,4688.99 2569.03,4631.94 3612.98,3587.99 3650.94,3587.99 3723.95,3514.98 U4.139@3723.95,3514.09
PB9: P12.1 U4.140 | length 1621.7
  Top Layer w10: P12.1@2523.03,4642.99 3598.03,3567.99 3642.65,3567.99 U4.140@3682.84,3527.8
PB12: P10.44 U4.73 | length 2108.5
  Top Layer w10: P10.44@4352.61,1862.57 4987.42,2497.38 4987.42,3417.49 4931.74,3473.16 4760.38,3473.16 U4.73@4731.71,3444.49
PB13: P10.41 U4.74 | length 2301.9
  Top Layer w10: P10.41@4252.61,1762.57 4303.01,1812.98 4366.65,1812.98 5007.42,2453.74 5007.42,3425.77 4931.91,3501.28 4761.32,3501.28 U4.74@4753.24,3493.2
PB14: P12.43 U4.75 | length 1305.1
  Top Layer w10: P12.43@4622.61,4642.57 4622.61,4339.22 4768.72,4193.11 4784.24,4193.11 4865.94,4111.41 4865.94,3633.95 4753.26,3521.28 4753.03,3521.28 U4.75@4733.89,3502.13
PB15: P12.42 U4.76 | length 1453.4
  Top Layer w10: P12.42@4522.61,4742.57 4573.03,4692.14 4573.03,4351.18 4844.06,4080.15 4844.06,3640.36 4744.98,3541.28 4744.75,3541.28 4689.95,3486.48 U4.76@4689.95,3486.25
PC0: P10.19 U4.26 | length 1583.1
  Top Layer w10: P10.19@3153.03,1762.99 3199.03,1808.99 3199.03,1883.05 3198.03,1884.05 3198.03,2186.08 3975.27,2963.33 3975.27,2966.44 U4.26@4002.34,2993.5
PC1: P10.22 U4.27 | length 1432.6
  Top Layer w10: P10.22@3253.03,1862.99 3253.03,2212.8 3995.27,2955.04 3995.27,2958.16 U4.27@4016.48,2979.36
PC2: P10.21 U4.28 | length 1524.3
  Top Layer w10: P10.21@3253.03,1762.99 3299.03,1808.99 3299.03,2230.51 4015.27,2946.76 4015.27,2949.87 U4.28@4030.62,2965.22
PC3: P10.24 U4.29 | length 1374.6
  Top Layer w10: P10.24@3353.03,1862.99 3353.03,2256.23 4035.27,2938.47 4035.27,2941.59 U4.29@4044.76,2951.08
PC4: P10.29 U4.44 | length 1536.5
  Top Layer w10: U4.44@4349.83,2945.67 4364.05,2931.45 4364.05,2930.72 4364.78,2930.72 4418.03,2877.47 4418.03,2876.22 4428.03,2866.22 v4(4428.03,2787.99)
  Bottom Layer w10: P10.29@3653.03,1762.99 3703.03,1812.99 3703.03,1997.99 4428.03,2722.99 v4(4428.03,2787.99)
PC5: P10.32 U4.45 | length 1434.2
  Top Layer w10: P10.32@3753.03,1862.99 3753.03,1912.99 4453.03,2612.99 4453.03,2869.5 4438.03,2884.5 4438.03,2885.75 4358.11,2965.67 U4.45@4355.89,2965.67
PC6: P12.31 U4.96 | length 1139.9
  Top Layer w10: P12.31@4023.03,4642.99 4214.05,4451.97 4214.05,4311.13 4530.78,3994.4 4530.78,3879.85 4414.68,3763.75 U4.96@4412.46,3763.75
PC7: P12.30 U4.97 | length 1255.4
  Top Layer w10: P12.30@3923.03,4742.99 3969.03,4696.99 3969.03,4631.94 4003.98,4596.99 4005.01,4596.99 4194.05,4407.94 4194.05,4302.84 4508.79,3988.11 4508.79,3886.14 4408.76,3786.11 4406.53,3786.11 U4.97@4398.31,3777.89
PC8: P12.29 U4.98 | length 1128.3
  Top Layer w10: P12.29@3923.03,4642.99 3923.03,4545.58 4486.77,3981.84 4486.77,3892.4 4400.47,3806.11 4398.24,3806.11 U4.98@4384.17,3792.03
PC9: P12.28 U4.99 | length 1244.8
  Top Layer w10: P12.28@3823.03,4742.99 3875.53,4690.49 3875.53,4564.8 4466.77,3973.56 4466.77,3900.69 4392.19,3826.11 4389.96,3826.11 U4.99@4370.03,3806.18
PC10: P12.23 U4.111 | length 942.1
  Top Layer w10: P12.23@3623.03,4642.99 3623.03,4395.39 U4.111@4114.14,3904.28
PC11: P12.22 U4.112 | length 1091.8
  Top Layer w10: P12.22@3523.03,4742.99 3523.03,4727.99 3573.03,4677.99 3573.03,4417.1 U4.112@4099.99,3890.14
PC12: P12.21 U4.113 | length 1000.1
  Top Layer w10: P12.21@3523.03,4642.99 3523.03,4438.82 U4.113@4085.85,3876
PC13: P10.7 U4.7 | length 2092.7
  Top Layer w10: P10.7@2553.03,1762.99 2599.03,1808.99 2599.03,2298.99 3454.66,3154.62 3637.19,3154.62 3737.87,3255.3 U4.7@3737.87,3257.97
PD0: P13.3 U4.114 | length 4801.8
  Top Layer w5: v1(3880.88,4035.86) 3880.88,4024.26 3911.69,3993.45 3939.25,3993.45 4042.4,3890.3 U4.114@4043.27,3890.3
  Bottom Layer w10: v1(3880.88,4035.86) 3896.72,4051.7 4940.88,4051.7 5104.83,3887.74 6572.5,3887.74 6626.13,3834.11 6626.13,2425.15 6425.05,2224.07 P13.3@6425.05,2187.04
PD1: P13.4 U4.115 | length 4630.6
  Top Layer w10: v1(3884.19,3982.06) 3884.19,3974.06 3948.99,3909.26 3998.52,3909.26 U4.115@4026.7,3881.09
  Bottom Layer w10: v1(3884.19,3982.06) 3890.49,3982.06 3940.13,4031.7 4932.59,4031.7 5096.55,3867.74 6564.22,3867.74 6606.13,3825.83 6606.13,2468.12 P13.4@6425.05,2287.04
PD2: P12.20 U4.116 | length 1163.5
  Top Layer w10: P12.20@3423.03,4742.99 3473.03,4692.99 3473.03,4335.76 3860.39,3948.4 3881.57,3948.4 3940.7,3889.26 3988.81,3889.26 U4.116@4013.47,3864.6
PD3: P12.19 U4.117 | length 1116.1
  Top Layer w10: P12.19@3423.03,4642.99 3423.03,4356.77 3851.4,3928.4 3873.29,3928.4 3932.42,3869.26 3980.53,3869.26 4009.47,3840.32 4011.06,3840.32 4030.17,3821.21 U4.117@4030.17,3820.32
PD4: P12.18 U4.118 | length 1255
  Top Layer w10: P12.18@3323.03,4742.99 3369.03,4696.99 3369.03,4382.48 3843.12,3908.4 3865,3908.4 3924.14,3849.26 3972.24,3849.26 U4.118@4001.19,3820.32 ; U4.118@4002.78,3820.32 U4.118@4010.17,3812.92
PD5: P12.17 U4.119 | length 1174.2
  Top Layer w10: P12.17@3323.03,4642.99 3323.03,4399.56 3834.2,3888.4 3856.72,3888.4 3915.85,3829.26 3963.96,3829.26 4000.74,3792.48 U4.119@4002.33,3792.48
PD6: P12.16 U4.122 | length 1269.9
  Top Layer w10: P12.16@3223.03,4742.99 3273.03,4692.99 3273.03,4421.28 3825.91,3868.4 3846.02,3868.4 U4.122@3934.73,3779.69
PD7: P12.15 U4.123 | length 1217.7
  Top Layer w10: P12.15@3223.03,4642.99 3223.03,4442.99 3817.63,3848.4 3837.74,3848.4 3946.66,3739.47 U4.123@3946.66,3736.8
PD8: P13.14 U4.77 | length 2307.9
  Top Layer w5: U4.77@4703.28,3530.61 4705.8,3530.61 4814.06,3638.87 v1(4814.06,3723.32)
  Bottom Layer w10: v1(4814.06,3723.32) 5055.47,3723.32 5162.91,3615.87 6438.85,3615.87 6516.05,3538.68 6516.05,3378.04 P13.14@6425.05,3287.04
PD9: P13.15 U4.78 | length 2141.8
  Top Layer w5: U4.78@4663.01,3513.2 U4.78@4691.15,3541.34 ; U4.78@4691.15,3544.25 4774.41,3627.51 v1(4774.41,3684.98) v1@4771.48,3684.98
  Bottom Layer w10: v1(4774.41,3684.98) 5027.38,3684.98 5126.15,3586.2 6404.83,3586.2 6479.4,3511.64 6479.4,3441.39 P13.15@6425.05,3387.04
PD10: P13.16 U4.79 | length 1900.1
  Top Layer w10: U4.79@4648.86,3527.34 4671.15,3549.63 4671.15,3552.53 4691.68,3573.06 4694.61,3573.06 4735,3613.45 v1(4735,3635)
  Bottom Layer w10: v1(4735,3635) 5024.73,3635 5029.19,3639.46 5113.09,3555.56 6356.53,3555.56 P13.16@6425.05,3487.04
PD11: P12.41 U4.80 | length 1280.4
  Top Layer w10: P12.41@4522.61,4642.57 4522.61,4367.44 4793.02,4097.03 4793.02,3746.43 4709.44,3662.85 4709.44,3659.92 4698.07,3648.56 4698.07,3604.81 4686.32,3593.06 4683.4,3593.06 4651.15,3560.82 4651.15,3557.91 U4.80@4634.72,3541.48
PD12: P12.40 U4.81 | length 1397
  Top Layer w10: P12.40@4422.61,4742.57 4467.61,4697.57 4467.61,4619.35 4463.03,4614.78 4463.03,4388.09 4770.6,4080.52 4770.6,3752.3 4689.37,3671.06 4678.07,3659.77 4678.07,3616.02 4631.15,3569.1 4631.15,3566.2 U4.81@4620.58,3555.63
PD13: P12.39 U4.82 | length 1263.3
  Top Layer w10: P12.39@4422.61,4642.57 4422.61,4394.85 4744.44,4073.01 4744.44,3754.43 4657.67,3667.65 4657.67,3623.91 4606.44,3572.67 U4.82@4606.44,3569.77
PD14: P13.1 U4.85 | length 2906.7
  Top Layer w10: U4.85@4564.27,3611.56 4574.59,3621.88 4578.6,3621.88 4625.25,3668.53 4625.25,3672.1 4644.13,3690.98 4644.13,3691.42 4702.71,3750.01 v1(4702.71,3768.75) ; v1(4935.43,3774.49) 5030.76,3774.49 5030.76,3398.04 5059.63,3369.17 5060.47,3369.17 6425.05,2004.59 P13.1@6425.05,1987.04
  Bottom Layer w10: v1@4706.37,3774.49 v1(4935.43,3774.49)
PD15: P13.2 U4.86 | length 2884.2
  Top Layer w10: U4.86@4570.31,3641.88 4605.25,3676.82 4605.25,3680.38 4624.13,3699.26 4624.13,3745.39 v1(4710.98,3832.24) ; v1(4921.41,3832.24) 5018.94,3832.24 5070.72,3780.46 5070.72,3441.38 P13.2@6425.05,2087.04
  Bottom Layer w10: v1(4710.98,3832.24) v1(4921.41,3832.24)
PE0: P10.2 U4.141 | length 2496.7
  Top Layer w10: P10.2@2253.03,1862.99 2253.03,2387.99 3440.25,3575.21 3516.96,3575.21 3544.18,3547.99 3634.37,3547.99 U4.141@3696.11,3486.25
PE3: P10.3 U4.2 | length 2232.5
  Top Layer w10: P10.3@2353.03,1762.99 2403.03,1812.99 2403.03,2272.99 3406.51,3276.47 3617.17,3276.47 U4.2@3662.19,3321.49 ; U4.2@3662.63,3321.49 U4.2@3668.49,3327.35
PE4: P10.6 U4.3 | length 2064.2
  Top Layer w10: P10.6@2453.03,1862.99 2453.03,2277.99 3431.51,3256.47 3625.9,3256.47 U4.3@3676.11,3306.68
PE5: P10.5 U4.4 | length 2133.8
  Top Layer w10: P10.5@2453.03,1762.99 2453.03,1782.99 2507.03,1836.99 2507.03,2296.99 3446.51,3236.47 3634.18,3236.47 U4.4@3677.44,3279.73
PE6: P10.8 U4.5 | length 1985.6
  Top Layer w10: P10.8@2553.03,1862.99 2553.03,2302.99 3466.51,3216.47 3642.46,3216.47 U4.5@3697.44,3271.45
PE7: P13.5 U4.58 | length 2290.1
  Top Layer w10: U4.58@4536.84,3146.62 4538.18,3146.62 4596.51,3088.29 4596.51,3076.19 4627.69,3045 v1(4660,3045)
  Bottom Layer w10: v1(4660,3045) 4681.74,3023.26 4681.74,2886.34 5181.04,2387.04 P13.5@6425.05,2387.04
PE8: P13.6 U4.59 | length 2218.5
  Top Layer w10: U4.59@4562.67,3152.45 v1(4626.51,3088.61)
  Bottom Layer w10: v1(4626.51,3088.61) 4633.19,3088.61 4646.8,3075 4672.43,3075 4701.74,3045.68 4701.74,2908.21 5122.91,2487.04 P13.6@6425.05,2487.04
PE9: P13.7 U4.60 | length 2164.7
  Top Layer w10: U4.60@4564.68,3174.46 4568.95,3174.46 4615.07,3128.33 4636.46,3128.33 4660.25,3104.54 4660.25,3087.18 4690,3057.43 4690,2970.7 v1(4839.79,2820.91)
  Bottom Layer w10: v1(4839.79,2820.91) 5073.66,2587.04 P13.7@6425.05,2587.04
PE10: P13.8 U4.63 | length 2066.8
  Top Layer w10: U4.63@4631.07,3191.3 4639.75,3182.62 4639.75,3156.26 4680.25,3115.76 4680.25,3095.46 4711.08,3064.63 4711.08,3002.19 v1(4801.67,2911.6)
  Bottom Layer w10: v1(4801.67,2911.6) 5026.23,2687.04 P13.8@6425.05,2687.04
PE11: P13.9 U4.64 | length 1993.7
  Top Layer w10: U4.64@4648.54,3202.11 4661.26,3189.39 4661.26,3163.03 4700.25,3124.04 4700.25,3103.74 4731.08,3072.91 4731.08,3042.39 v1(4791.68,2981.79)
  Bottom Layer w10: v1(4791.68,2981.79) 4812.47,2961 4812.47,2960.91 4986.34,2787.04 P13.9@6425.05,2787.04
PE12: P13.10 U4.65 | length 1979
  Top Layer w5: U4.65@4634.28,3244.05 4680.19,3198.14 4680.19,3178.66 4723.87,3134.97 4723.87,3113.49 4789.49,3047.87 v1(4789.49,3032.04)
  Bottom Layer w10: v1@4789.49,3024.96 v1(4789.49,3032.04) 4802.01,3032.04 4947,2887.04 P13.10@6425.05,2887.04
PE13: P13.11 U4.66 | length 1907.7
  Top Layer w10: U4.66@4648.42,3258.2 4681.62,3225 4683.28,3225 4712.49,3195.79 4712.49,3174.64 4761.44,3125.69 v1(4761.44,3120.09)
  Bottom Layer w10: v1(4761.44,3120.09) 4761.44,3114.79 4779.13,3097.1 4780.29,3097.1 4890.34,2987.04 P13.11@6425.05,2987.04
PE14: P13.12 U4.67 | length 1849.1
  Top Layer w10: U4.67@4662.56,3272.34 4673.71,3261.19 4683.37,3261.19 4732.49,3212.07 4732.49,3201.52 4742.49,3191.52 v1(4742.49,3187.06)
  Bottom Layer w10: v1(4742.49,3187.06) 4742.49,3185.32 4840.77,3087.04 P13.12@6425.05,3087.04
PE15: P13.13 U4.68 | length 1789.5
  Top Layer w10: U4.68@4676.7,3286.48 4686.37,3286.48 4741.07,3231.78 v1(4797.2,3231.78)
  Bottom Layer w10: v1(4797.2,3231.78) 4841.94,3187.04 P13.13@6425.05,3187.04
PF0: P10.10 U4.10 | length 1939
  Top Layer w10: P10.10@2653.03,1862.99 2653.03,2292.99 3494.66,3134.62 3698.03,3134.62 U4.10@3779.62,3216.22
PF1: P10.9 U4.11 | length 2026.8
  Top Layer w10: P10.9@2653.03,1762.99 2707.03,1816.99 2707.03,2311.99 3509.66,3114.62 3706.32,3114.62 U4.11@3793.77,3202.07
PF2: P10.12 U4.12 | length 1842.1
  Top Layer w10: P10.12@2753.03,1862.99 2753.03,2317.99 3529.66,3094.62 3714.6,3094.62 U4.12@3788,3168.02
PF3: P10.11 U4.13 | length 1943.7
  Top Layer w10: P10.11@2753.03,1762.99 2807.03,1816.99 2807.03,2311.99 3569.66,3074.62 3722.88,3074.62 3821.38,3173.12 U4.13@3821.38,3174.46
PF4: P10.14 U4.14 | length 1797.1
  Top Layer w10: P10.14@2853.03,1862.99 2853.03,2322.99 3584.66,3054.62 3731.17,3054.62 U4.14@3841.38,3164.84
PF5: P10.13 U4.15 | length 1890.2
  Top Layer w10: P10.13@2853.03,1762.99 2853.03,1797.94 2899.03,1843.94 2899.03,2328.99 3604.66,3034.62 3739.45,3034.62 U4.15@3861.38,3156.55
PF6: P10.16 U4.18 | length 1701.4
  Top Layer w10: P10.16@2953.03,1862.99 2943.03,1872.99 2943.03,2167.91 3047.03,2271.91 3047.03,2368.21 3612.96,2934.14 3719.82,2934.14 U4.18@3890.76,3105.08
PF7: P10.15 U4.19 | length 1780.4
  Top Layer w10: P10.15@2953.03,1762.99 2953.03,1772.99 3007.03,1826.99 3007.03,2203.63 3067.03,2263.63 3067.03,2352.34 3628.84,2914.14 3728.1,2914.14 U4.19@3904.9,3090.94
PF8: P10.18 U4.20 | length 1630.7
  Top Layer w10: P10.18@3053.03,1862.99 3053.03,2221.35 3087.03,2255.35 3087.03,2344.05 3637.12,2894.14 3736.39,2894.14 U4.20@3919.04,3076.8
PF11: P10.36 U4.49 | length 1477.4
  Top Layer w10: P10.36@3952.61,1862.57 3952.61,2022.57 4563.03,2632.99 4563.03,2873.89 4533.93,2902.99 4532.68,2902.99 4518.03,2917.64 4518.03,2918.89 4415.57,3021.34 U4.49@4411.57,3021.34
PF12: P10.35 U4.50 | length 1692.1
  Top Layer w10: U4.50@4415.57,3041.34 4423.86,3041.34 4537.21,2927.99 v4(4543.03,2927.99)
  Bottom Layer w10: P10.35@3952.61,1762.57 3952.61,1798.93 3997.61,1843.93 3997.61,1932.57 4673.03,2607.99 4673.03,2797.99 v4(4543.03,2927.99)
PF13: P10.38 U4.53 | length 1482.5
  Top Layer w10: P10.38@4052.61,1862.57 4052.61,2082.57 4571.14,2601.1 4571.14,2612.82 4583.03,2624.71 4583.03,2882.17 4568.49,2896.72 4568.49,2937.89 4553.39,2952.99 4552.77,2952.99 4496.51,3009.25 4496.51,3046.87 4495.85,3047.53 4495.85,3048.42 U4.53@4467.24,3077.02
PF14: P10.37 U4.54 | length 1642.2
  Top Layer w10: U4.54@4515.85,3055.81 4516.51,3055.15 4516.51,3019.52 v4(4618.03,2917.99)
  Bottom Layer w10: P10.37@4052.61,1762.57 4107.61,1817.57 4107.61,1892.99 4705.43,2490.81 4705.43,2802.09 4618.03,2889.49 v4(4618.03,2917.99)
PF15: P10.40 U4.55 | length 1469.8
  Top Layer w10: P10.40@4152.61,1862.57 4648.03,2357.99 4648.03,2923.35 4536.51,3034.87 4536.51,3063.43 U4.55@4524.13,3075.81
PG0: P10.39 U4.56 | length 1700.4
  Top Layer w10: U4.56@4515.53,3112.7 4556.51,3071.72 4556.51,3049 4626.33,2979.19 v4(4631.69,2979.19)
  Bottom Layer w10: P10.39@4152.61,1762.57 4207.61,1817.57 4207.61,1964.71 4748.03,2505.13 4748.03,2790.23 4653.76,2884.5 4653.76,2964.23 4638.81,2979.19 v4(4631.69,2979.19)
PG1: P10.42 U4.57 | length 1476
  Top Layer w10: P10.42@4252.61,1862.57 4658.03,2267.99 4658.03,2339.71 4668.03,2349.71 4668.03,2976.38 4656.69,2987.71 4656.69,2989.54 4642.05,3004.19 4640.22,3004.19 4576.51,3067.9 4576.51,3080 U4.57@4542.92,3113.59
PG2: P12.38 U4.87 | length 1307.8
  Top Layer w10: P12.38@4322.61,4742.57 4373.03,4692.14 4373.03,4411.81 4675.74,4109.11 4675.74,3826.81 4604.13,3755.21 4604.13,3707.54 4585.25,3688.66 4585.25,3685.1 U4.87@4538.18,3638.03
PG3: P12.37 U4.88 | length 1134.2
  Top Layer w10: P12.37@4322.61,4642.57 4348.6,4616.58 4348.6,4403.63 4655.74,4096.49 4655.74,3835.1 4584.13,3763.49 4584.13,3715.83 4565.25,3696.95 4565.25,3693.39 U4.88@4558.48,3686.62
PG4: P12.36 U4.89 | length 1299.5
  Top Layer w10: P12.36@4222.61,4742.57 4275.91,4689.26 4275.91,4599.41 4328.6,4546.72 4328.6,4380.5 4635.74,4073.36 4635.74,3843.38 4564.13,3771.77 4564.13,3724.11 4545.25,3705.23 4545.25,3701.67 U4.89@4509.89,3666.31
PG5: P12.35 U4.90 | length 1174.6
  Top Layer w10: P12.35@4222.61,4642.57 4222.61,4624.43 4299.84,4547.2 4299.84,4369.28 4615.74,4053.38 4615.74,3851.66 4544.13,3780.06 4544.13,3732.4 4525.25,3713.52 4525.25,3709.95 U4.90@4495.75,3680.46
PG6: P12.34 U4.91 | length 1291.5
  Top Layer w10: P12.34@4123.03,4742.99 4169.03,4696.99 4169.03,4622.94 4274.05,4517.91 4274.05,4348.87 4595.74,4027.19 4595.74,3859.95 4524.13,3788.34 4524.13,3740.68 4505.25,3721.8 4505.25,3718.24 U4.91@4481.61,3694.6
PG7: P12.33 U4.92 | length 1164.4
  Top Layer w10: P12.33@4123.03,4642.99 4123.03,4640.65 4254.05,4509.63 4254.05,4327.69 4573.08,4008.67 4573.08,3865.57 4504.13,3796.63 4504.13,3748.97 4485.25,3730.09 4485.25,3726.52 U4.92@4467.47,3708.74
PG8: P12.32 U4.93 | length 1301.1
  Top Layer w10: P12.32@4023.03,4742.99 4073.03,4692.99 4073.03,4627.94 4103.98,4596.99 4138.41,4596.99 4234.05,4501.35 4234.05,4319.41 4553.08,4000.39 4553.08,3873.86 4484.13,3804.91 4484.13,3757.25 4453.32,3726.45 U4.93@4453.32,3722.88
PG9: P12.14 U4.124 | length 1341.6
  Top Layer w10: P12.14@3123.03,4742.99 3177.03,4688.99 3177.03,4453.99 3802.63,3828.4 3829.45,3828.4 U4.124@3913.38,3744.47
PG10: P12.13 U4.125 | length 1279.9
  Top Layer w10: P12.13@3123.03,4642.99 3123.03,4477.99 3792.63,3808.4 3821.17,3808.4 U4.125@3919.71,3709.85
PG11: P12.12 U4.126 | length 1434.5
  Top Layer w10: P12.12@3023.03,4742.99 3077.03,4688.99 3077.03,4487.28 3775.91,3788.4 3812.88,3788.4 U4.126@3905.57,3695.71
PG12: P12.11 U4.127 | length 1342.8
  Top Layer w10: P12.11@3023.03,4642.99 3023.03,4512.99 3767.63,3768.4 3804.6,3768.4 U4.127@3891.42,3681.57
PG13: P12.10 U4.128 | length 1493.5
  Top Layer w10: P12.10@2923.03,4742.99 2969.03,4696.99 2969.03,4536.99 3757.63,3748.4 3796.32,3748.4 U4.128@3877.28,3667.43
PG14: P12.9 U4.129 | length 1410.4
  Top Layer w10: P12.9@2923.03,4642.99 2923.03,4539.94 3734.58,3728.4 3788.03,3728.4 U4.129@3863.14,3653.29
PG15: P12.8 U4.132 | length 1544.5
  Top Layer w10: P12.8@2823.03,4742.99 2873.03,4692.99 2873.03,4561.66 U4.132@3822.27,3612.42
PH0-OSC_IN: C47.2 R24.1 U4.23 Y3.1 | length 3436.1
  Top Layer w10: C47.2@1974.95,4828.38 1974.95,4811.09 1954.45,4790.59 Y3.1@1954.45,4668.32 1954.56,4668.21 1954.56,4453.48 R24.1@1993.32,4414.72 1993.32,4405.89 2498.91,3900.3 2498.91,3570.29 2828.81,3240.4 v1(2964.87,3240.4) ; v1@3531.96,2673.31 3692.8,2834.14 3761.24,2834.14 U4.23@3934.34,3007.24
  Bottom Layer w10: v1(2964.87,3240.4) v1(3531.05,2674.22)
PH1-OSC_OUT: C48.2 R24.2 U4.24 Y3.2 | length 3351.1
  Top Layer w10: C48.2@2173.38,4824.23 2173.38,4695.12 Y3.2@2146.58,4668.32 2146.58,4477.98 R24.2@2083.32,4414.72 2083.32,4382.51 2545.05,3920.78 2545.05,3605.34 2861.11,3289.27 2985.73,3289.27 v1(3000,3275) ; v1(3700.55,2798.5) 3753.87,2798.5 3974.5,3019.12 U4.24@3974.5,3021.34
  Bottom Layer w10: v1(3000,3275) 3532.5,2742.5 3644.56,2742.5 v1(3700.55,2798.5)
RESET: C22.2 D3.1 K6.1 R11.1 U4.25 | length 6747.8
  Top Layer w10: v2(2717.76,3113.67) 2569.7,3261.73 D3.1@2215.37,3261.73 2215.37,2584.48 1960.99,2330.1 1960.99,1429.37 2165.51,1224.85 3655.47,1224.85 3688.02,1257.4 3688.02,1386.64 3645.31,1429.35 R11.1@3570.14,1429.35 3460.96,1429.35 3458.05,1432.27 ; K6.1@3081.93,1359.63 K6.1@3337.84,1359.63 3429.09,1359.63 3458.05,1388.59 3458.05,1432.27 ; C22.2@3458.05,1475.94 3458.05,1432.27 ; v1(3593.51,2649.06) 3632.72,2649.06 U4.25@3955.27,2971.61
  Bottom Layer w10: v2(2717.76,3113.67) 3187.21,2644.22 3588.67,2644.22 v1(3593.51,2649.06)
RXD: P8.4 U5.3 | length 8126.2
  Top Layer w10: v1(1568.33,3742.48) 1572.8,3746.96 U5.3@1774.33,3746.96
  Top Layer w30: v2@1112.76,4221.51 v2(1112.76,4226.37) 1112.76,4947.75 1284.23,5119.22 6297.84,5119.22 6653.36,4763.71 6653.36,4266.31 P8.4@6496.88,4109.83
  Bottom Layer w30: v2(1112.76,4226.37) 1112.76,4126.45 1496.73,3742.48 v1(1568.33,3742.48)
TXD: P8.2 U5.2 | length 7681.7
  Top Layer w10: v1(1567.9,3797.29) 1568.24,3796.96 U5.2@1774.33,3796.96
  Top Layer w30: v2(1180.85,4294.24) 1180.85,4881.98 1263.17,4964.3 6310.88,4964.3 6605.93,4669.26 6605.93,4318.88 P8.2@6396.88,4109.83
  Bottom Layer w30: v2(1180.85,4294.24) 1185.42,4294.24 1567.9,3911.75 v1(1567.9,3797.29)